# EAGLE board driver2 (EAGLE 6.5.0)
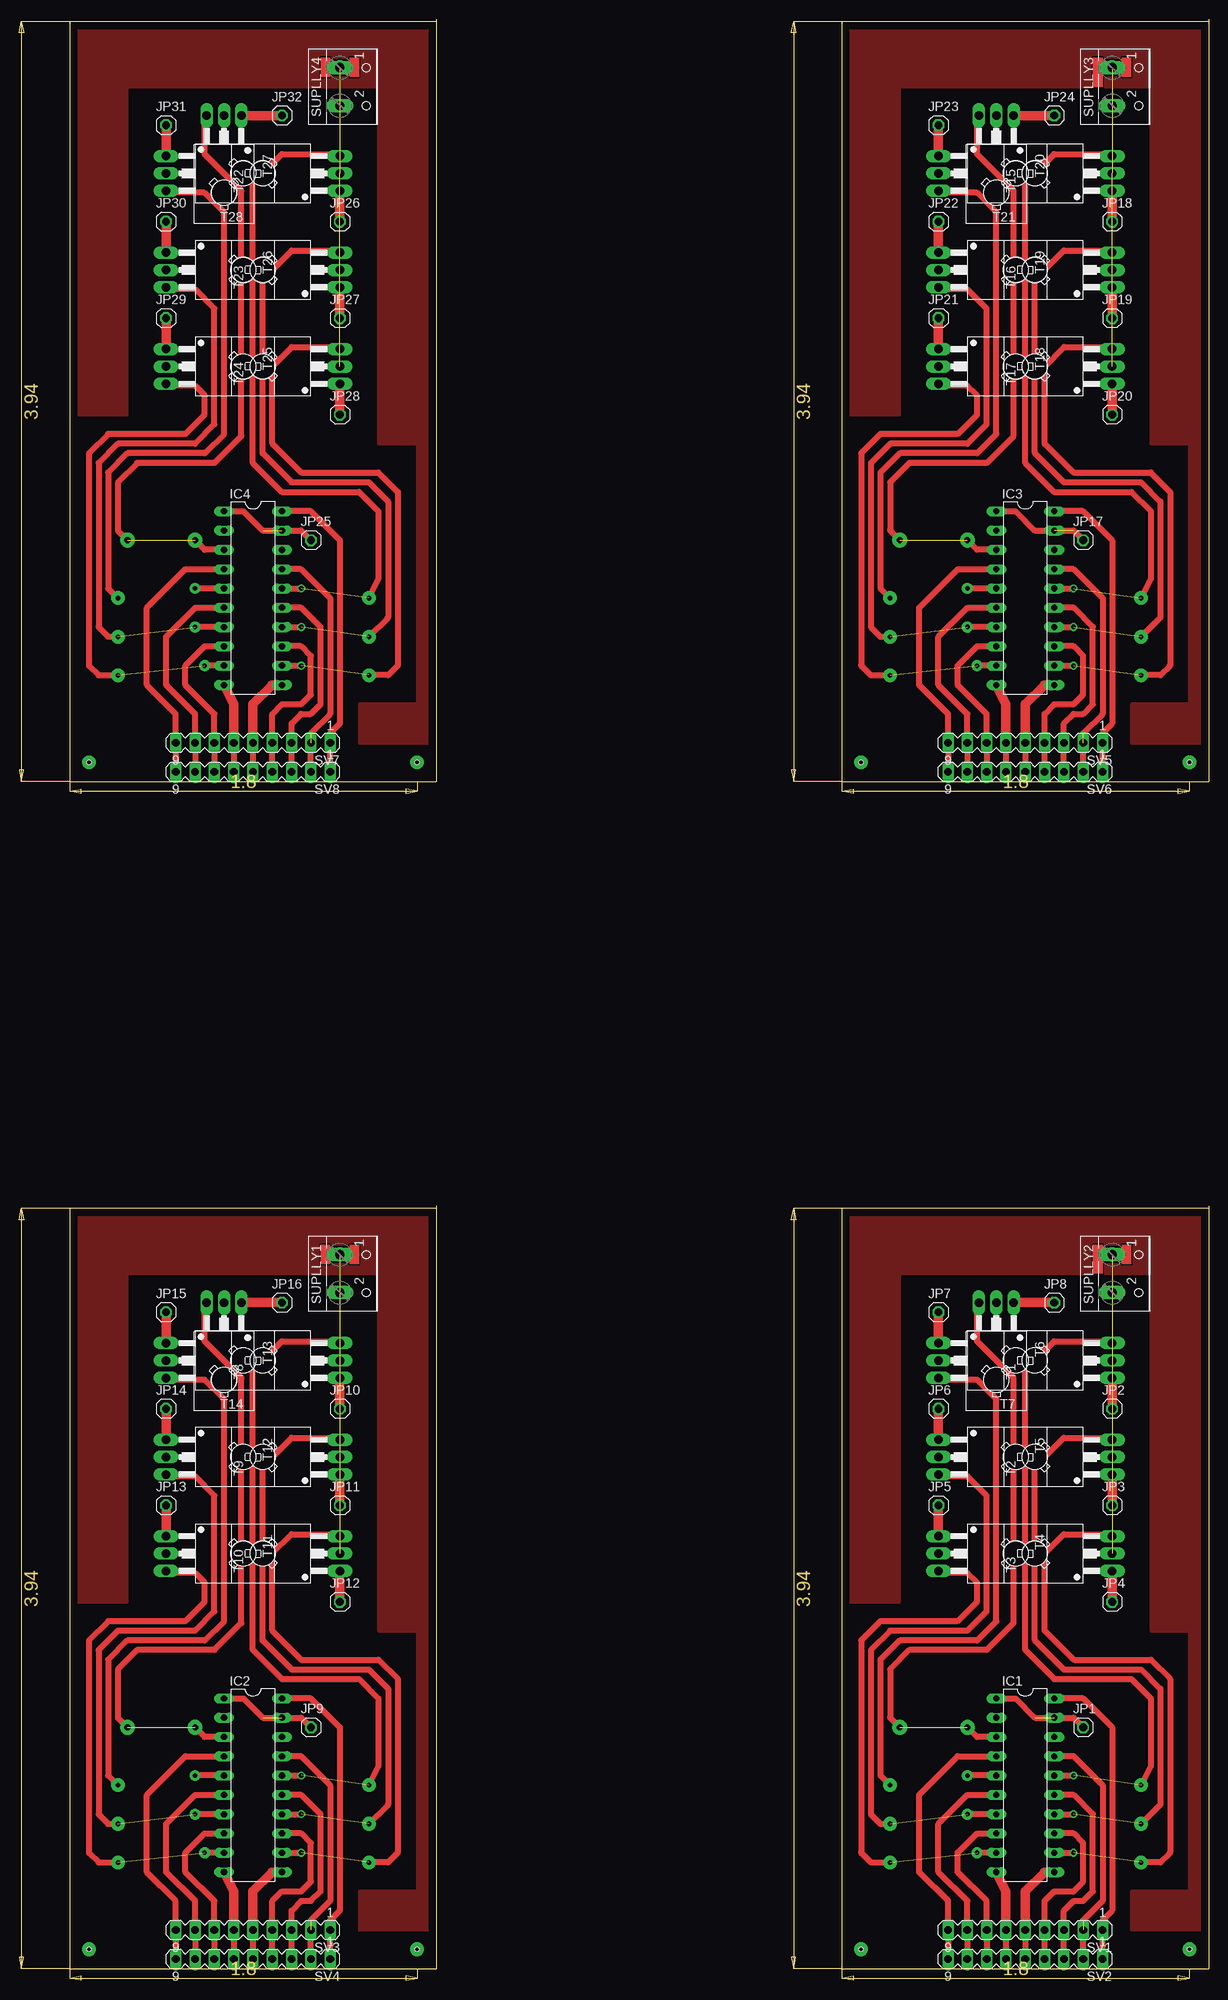
[diagram p0: board, top side]

Size 149.86 x 256.54 mm. Coordinates in mm from the lower left corner, seen from the top.
Outline: 149.84,0 101.6,0 101.6,100 149.84,100
Outline: 149.86,100.33 149.86,0
Outline: 48.24,0 0,0 0,100 48.24,100
Outline: 48.26,100.33 48.26,0
Outline: 149.84,156.21 101.6,156.21 101.6,256.21 149.84,256.21
Outline: 149.86,256.54 149.86,156.21
Outline: 48.24,156.21 0,156.21 0,256.21 48.24,256.21
Outline: 48.26,256.54 48.26,156.21
Copper layers (1*16): Top 0.035mm / dielectric 1.5mm / Bottom 0.035mm
Design rules "default": minimum track width 10mil, minimum drill 24mil, track to track 8mil, track to pad 8mil, pad to pad 8mil, via to via 8mil, smd to smd 8mil, copper to edge 40mil, drill to drill 8mil, minimum pad ring 10mil, minimum via ring 8mil, stop-mask expansion 4mil, vias tented up to drill 0mil, thermal gap 10mil
Holes 0.6 mm at 147.32,2.54 104.14,2.54 45.72,2.54 2.54,2.54 147.32,158.75 104.14,158.75 45.72,158.75 2.54,158.75

## Footprints (pad centres in the part's own frame; a part is rotated, then mirrored left to right if it is on the bottom)
DIL20 = drill 0.813 long: 1 -11.43,-3.81; 2 -8.89,-3.81; 3 -6.35,-3.81; 4 -3.81,-3.81; 5 -1.27,-3.81; 6 1.27,-3.81; 7 3.81,-3.81; 8 6.35,-3.81; 9 8.89,-3.81; 10 11.43,-3.81; 11 11.43,3.81; 12 8.89,3.81; 13 6.35,3.81; 14 3.81,3.81; 15 1.27,3.81; 16 -1.27,3.81; 17 -3.81,3.81; 18 -6.35,3.81; 19 -8.89,3.81; 20 -11.43,3.81
1X01 = drill 1.016 octagon: 1 0,0
W237-102 = drill 1.194 long: 1 -2.5,-1.27; 2 2.5,-1.27
MA09-1 = drill 1.016 long: 1 -10.16,0; 2 -7.62,0; 3 -5.08,0; 4 -2.54,0; 5 0,0; 6 2.54,0; 7 5.08,0; 8 7.62,0; 9 10.16,0
TO126 = drill 1.118 long: 1 -2.286,-5.08; 2 0,-5.08; 3 2.286,-5.08 | hole 3.302: 0,5.08

## Placement (x,y rotation side)
IC1  74LS244N  [DIL20]  125.73,24.13 270 top
IC2  74LS244N  [DIL20]  24.13,24.13 270 top
IC3  74LS244N  [DIL20]  125.73,180.34 270 top
IC4  74LS244N  [DIL20]  24.13,180.34 270 top
JP1  [1X01]  133.35,31.75 0 top
JP2  [1X01]  137.16,73.66 0 top
JP3  [1X01]  137.16,60.96 0 top
JP4  [1X01]  137.16,48.26 0 top
JP5  [1X01]  114.3,60.96 0 top
JP6  [1X01]  114.3,73.66 0 top
JP7  [1X01]  114.3,86.36 0 top
JP8  [1X01]  129.54,87.63 0 top
JP9  [1X01]  31.75,31.75 0 top
JP10  [1X01]  35.56,73.66 0 top
JP11  [1X01]  35.56,60.96 0 top
JP12  [1X01]  35.56,48.26 0 top
JP13  [1X01]  12.7,60.96 0 top
JP14  [1X01]  12.7,73.66 0 top
JP15  [1X01]  12.7,86.36 0 top
JP16  [1X01]  27.94,87.63 0 top
JP17  [1X01]  133.35,187.96 0 top
JP18  [1X01]  137.16,229.87 0 top
JP19  [1X01]  137.16,217.17 0 top
JP20  [1X01]  137.16,204.47 0 top
JP21  [1X01]  114.3,217.17 0 top
JP22  [1X01]  114.3,229.87 0 top
JP23  [1X01]  114.3,242.57 0 top
JP24  [1X01]  129.54,243.84 0 top
JP25  [1X01]  31.75,187.96 0 top
JP26  [1X01]  35.56,229.87 0 top
JP27  [1X01]  35.56,217.17 0 top
JP28  [1X01]  35.56,204.47 0 top
JP29  [1X01]  12.7,217.17 0 top
JP30  [1X01]  12.7,229.87 0 top
JP31  [1X01]  12.7,242.57 0 top
JP32  [1X01]  27.94,243.84 0 top
SUPLLY1  [W237-102]  36.83,91.44 270 top
SUPLLY2  [W237-102]  138.43,91.44 270 top
SUPLLY3  [W237-102]  138.43,247.65 270 top
SUPLLY4  [W237-102]  36.83,247.65 270 top
SV1  [MA09-1]  125.73,5.08 180 top
SV2  [MA09-1]  125.73,1.27 180 top
SV3  [MA09-1]  24.13,5.08 180 top
SV4  [MA09-1]  24.13,1.27 180 top
SV5  [MA09-1]  125.73,161.29 180 top
SV6  [MA09-1]  125.73,157.48 180 top
SV7  [MA09-1]  24.13,161.29 180 top
SV8  [MA09-1]  24.13,157.48 180 top
T1  BD139  [TO126]  132.08,80.01 90 top
T2  BD139  [TO126]  132.08,67.31 90 top
T3  BD139  [TO126]  132.08,54.61 90 top
T4  BD139  [TO126]  119.38,54.61 270 top
T5  BD139  [TO126]  119.38,67.31 270 top
T6  BD139  [TO126]  119.38,80.01 270 top
T7  BD139  [TO126]  121.92,82.55 180 top
T8  BD139  [TO126]  30.48,80.01 90 top
T9  BD139  [TO126]  30.48,67.31 90 top
T10  BD139  [TO126]  30.48,54.61 90 top
T11  BD139  [TO126]  17.78,54.61 270 top
T12  BD139  [TO126]  17.78,67.31 270 top
T13  BD139  [TO126]  17.78,80.01 270 top
T14  BD139  [TO126]  20.32,82.55 180 top
T15  BD139  [TO126]  132.08,236.22 90 top
T16  BD139  [TO126]  132.08,223.52 90 top
T17  BD139  [TO126]  132.08,210.82 90 top
T18  BD139  [TO126]  119.38,210.82 270 top
T19  BD139  [TO126]  119.38,223.52 270 top
T20  BD139  [TO126]  119.38,236.22 270 top
T21  BD139  [TO126]  121.92,238.76 180 top
T22  BD139  [TO126]  30.48,236.22 90 top
T23  BD139  [TO126]  30.48,223.52 90 top
T24  BD139  [TO126]  30.48,210.82 90 top
T25  BD139  [TO126]  17.78,210.82 270 top
T26  BD139  [TO126]  17.78,223.52 270 top
T27  BD139  [TO126]  17.78,236.22 270 top
T28  BD139  [TO126]  20.32,238.76 180 top

## Library data of the parts
IC1-IC4 = 74xx-us
JP1-JP32 = pinhead
SUPLLY1-SUPLLY4 = con-wago-500; MPN: 237-102; OC_FARNELL: unknown; OC_NEWARK: 70K9898
SV1-SV8 = con-lstb; OC_FARNELL: unknown; OC_NEWARK: unknown
T1-T28 = transistor

## Nets
ACTIVE: IC1.1 IC1.19 JP1.1
ACTIVE1: IC2.1 IC2.19 JP9.1
ACTIVE2: IC3.1 IC3.19 JP17.1
ACTIVE3: IC4.1 IC4.19 JP25.1
GND1: IC1.10 SV1.6 SV2.6
GND2: SUPLLY2.2
GND3: SUPLLY1.2
GND4: IC2.10 SV3.6 SV4.6
GND5: SUPLLY3.2
GND6: IC3.10 SV5.6 SV6.6
GND7: SUPLLY4.2
GND8: IC4.10 SV7.6 SV8.6
N$1: IC1.4 SV1.9 SV2.9
N$2: IC1.6 SV1.8 SV2.8
N$3: IC1.8 SV1.7 SV2.7
N$4: IC1.3 T7.3
N$5: IC1.11 SV1.5 SV2.5
N$6: IC1.13 SV1.4 SV2.4
N$7: IC1.16 T1.3
N$8: JP2.1 T1.1
N$9: IC1.14 T2.3
N$10: IC1.12 T3.3
N$11: IC1.15 SV1.3 SV2.3
N$12: IC1.9 T4.3
N$13: IC1.7 T5.3
N$14: JP3.1 T2.1
N$15: JP4.1 T3.1
N$16: JP5.1 T4.1
N$17: JP6.1 T5.1
N$18: JP7.1 T6.1
N$19: JP8.1 T7.1
N$20: T6.3
N$21: IC1.17 SV1.2 SV2.2
N$22: IC2.12 T10.3
N$23: JP10.1 T8.1
N$24: JP11.1 T9.1
N$25: JP12.1 T10.1
N$26: JP13.1 T11.1
N$27: JP14.1 T12.1
N$28: JP15.1 T13.1
N$29: JP16.1 T14.1
N$30: IC2.3 T14.3
N$31: IC2.16 T8.3
N$32: IC2.14 T9.3
N$33: IC2.9 T11.3
N$34: IC2.7 T12.3
N$35: T13.3
N$36: IC2.4 SV3.9 SV4.9
N$37: IC2.6 SV3.8 SV4.8
N$38: IC2.8 SV3.7 SV4.7
N$39: IC2.11 SV3.5 SV4.5
N$40: IC2.13 SV3.4 SV4.4
N$41: IC2.15 SV3.3 SV4.3
N$42: IC2.17 SV3.2 SV4.2
N$43: IC3.12 T17.3
N$44: JP18.1 T15.1
N$45: JP19.1 T16.1
N$46: JP20.1 T17.1
N$47: JP21.1 T18.1
N$48: JP22.1 T19.1
N$49: JP23.1 T20.1
N$50: JP24.1 T21.1
N$51: IC3.3 T21.3
N$52: IC3.16 T15.3
N$53: IC3.14 T16.3
N$54: IC3.9 T18.3
N$55: IC3.7 T19.3
N$56: T20.3
N$57: IC3.4 SV5.9 SV6.9
N$58: IC3.6 SV5.8 SV6.8
N$59: IC3.8 SV5.7 SV6.7
N$60: IC3.11 SV5.5 SV6.5
N$61: IC3.13 SV5.4 SV6.4
N$62: IC3.15 SV5.3 SV6.3
N$63: IC3.17 SV5.2 SV6.2
N$64: IC4.12 T24.3
N$65: JP26.1 T22.1
N$66: JP27.1 T23.1
N$67: JP28.1 T24.1
N$68: JP29.1 T25.1
N$69: JP30.1 T26.1
N$70: JP31.1 T27.1
N$71: JP32.1 T28.1
N$72: IC4.3 T28.3
N$73: IC4.16 T22.3
N$74: IC4.14 T23.3
N$75: IC4.9 T25.3
N$76: IC4.7 T26.3
N$77: T27.3
N$78: IC4.4 SV7.9 SV8.9
N$79: IC4.6 SV7.8 SV8.8
N$80: IC4.8 SV7.7 SV8.7
N$81: IC4.11 SV7.5 SV8.5
N$82: IC4.13 SV7.4 SV8.4
N$83: IC4.15 SV7.3 SV8.3
N$84: IC4.17 SV7.2 SV8.2
S$5: IC1.5
S$8: IC2.5
S$15: IC3.5
S$22: IC4.5
VCC1: IC1.20 SV1.1 SV2.1
VCC2: SUPLLY2.1 T1.2 T2.2 T3.2
VCC3: SUPLLY1.1 T8.2 T9.2 T10.2
VCC4: IC2.20 SV3.1 SV4.1
VCC5: SUPLLY3.1 T15.2 T16.2 T17.2
VCC6: IC3.20 SV5.1 SV6.1
VCC7: SUPLLY4.1 T22.2 T23.2 T24.2
VCC8: IC4.20 SV7.1 SV8.1

## Tracks (layer width: path | path; a pad name or v marks a point on that pad's centre or on a via)
ACTIVE  (1 unrouted)
  Top 0.813: IC1.1 124.46,35.56 127,33.02 132.08,33.02 JP1.1
ACTIVE1  (1 unrouted)
  Top 0.813: IC2.1 22.86,35.56 25.4,33.02 30.48,33.02 JP9.1
ACTIVE2  (1 unrouted)
  Top 0.813: IC3.1 124.46,191.77 127,189.23 132.08,189.23 JP17.1
ACTIVE3  (1 unrouted)
  Top 0.813: IC4.1 22.86,191.77 25.4,189.23 30.48,189.23 JP25.1
GND1
  Top 0.813: SV1.6 SV2.6
  Top 1.27: SV1.6 123.19,10.16 IC1.10
GND4
  Top 0.813: SV3.6 SV4.6
  Top 1.27: SV3.6 21.59,10.16 IC2.10
GND6
  Top 0.813: SV5.6 SV6.6
  Top 1.27: SV5.6 123.19,166.37 IC3.10
GND8
  Top 0.813: SV7.6 SV8.6
  Top 1.27: SV7.6 21.59,166.37 IC4.10
N$1
  Top 0.813: SV2.9 SV1.9 115.57,8.89 111.76,12.7 111.76,22.86 116.84,27.94 IC1.4
N$2
  Top 0.813: SV2.8 SV1.8 118.11,8.89 114.3,12.7 114.3,19.05 118.11,22.86 IC1.6
N$3
  Top 0.813: SV2.7 SV1.7 120.65,8.89 116.84,12.7 116.84,15.24 119.38,17.78 IC1.8
N$4  (1 unrouted)
  Top 0.813: T7.3 119.38,87.38 119.38,82.55 124.21,77.72 124.21,45.47 120.65,41.91 110.49,41.91 107.95,39.37 107.95,33.12 arc45 108.02,32.95 109.22,31.75 | IC1.3 119.38,30.48 118.11,31.75
N$5
  Top 0.813: SV1.5 SV2.5
  Top 1.27: SV1.5 125.73,10.16 128.2,12.63 arc-45 128.38,12.7 IC1.11
N$6
  Top 0.813: SV2.4 SV1.4 128.27,8.89 129.54,10.16 132.08,10.16 133.35,11.43 133.35,16.51 132.08,17.78 IC1.13
N$7  (via drill 0.6 pad 0.41, 0.6 pad 1.78)  (1 unrouted)
  Top 0.813: v140.97,24.13 142.24,26.67 142.24,35.56 139.7,38.1 129.54,38.1 125.73,41.91 125.73,78.74 129.54,82.55 136.91,82.55 T1.3 | IC1.16 v132.08,25.4
N$8
  Top 1.27: JP2.1 T1.1
N$9  (via drill 0.6 pad 0.41, 0.6 pad 1.78)  (1 unrouted)
  Top 0.813: IC1.14 v132.08,20.32 | T2.3 136.91,69.85 130.81,69.85 127,66.04 127,43.18 130.81,39.37 140.97,39.37 143.51,36.83 143.51,21.7 arc-45 143.44,21.52 v140.97,19.05
N$10  (via drill 0.6 pad 1.78)  (1 unrouted)
  Top 0.813: T3.3 136.91,57.15 130.81,57.15 128.27,54.61 128.27,44.45 132.08,40.64 142.24,40.64 144.78,38.1 144.78,15.34 arc-45 144.71,15.17 143.51,13.97 v140.97,13.97 | IC1.12 132.08,15.24
N$11
  Top 0.813: SV2.3 SV1.3 130.81,7.62 132.08,8.89 133.35,8.89 134.62,10.16 134.62,20.32 132.08,22.86 IC1.15
N$12  (via drill 0.6 pad 1.42, 0.6 pad 1.78)  (1 unrouted)
  Top 0.813: IC1.9 v119.38,15.24 | T4.3 114.55,52.07 118.11,52.07 119.38,50.8 119.38,48.26 116.84,45.72 106.68,45.72 104.14,43.18 104.14,15.34 arc45 104.21,15.17 105.41,13.97 v107.95,13.97
N$13  (via drill 0.6 pad 1.42, 0.6 pad 1.78)  (1 unrouted)
  Top 0.813: IC1.7 v118.11,20.32 | T5.3 114.3,64.77 118.11,64.77 120.65,62.23 120.65,46.99 118.11,44.45 107.95,44.45 105.41,41.91 105.41,20.32 106.68,19.05 v107.95,19.05
N$14
  Top 1.27: JP3.1 T2.1
N$15
  Top 1.27: JP4.1 T3.1
N$16
  Top 1.27: JP5.1 T4.1
N$17
  Top 1.27: JP6.1 T5.1
N$18
  Top 1.27: T6.1 JP7.1
N$19
  Top 1.27: JP8.1 T7.1
N$20  (via drill 0.6 pad 1.78)
  Top 0.813: v107.95,24.13 106.68,25.4 106.68,40.64 109.22,43.18 119.38,43.18 121.92,45.72 121.92,74.93 119.38,77.47 114.55,77.47 T6.3
N$21  (1 unrouted)
  Top 0.813: SV2.2 SV1.2 | 133.35,6.35 135.89,8.89 135.89,24.13 132.08,27.94 IC1.17
N$22  (via drill 0.6 pad 1.78)  (1 unrouted)
  Top 0.813: T10.3 35.31,57.15 29.21,57.15 26.67,54.61 26.67,44.45 30.48,40.64 40.64,40.64 43.18,38.1 43.18,15.34 arc-45 43.11,15.17 41.91,13.97 v39.37,13.97 | IC2.12 30.48,15.24
N$23
  Top 1.27: JP10.1 T8.1
N$24
  Top 1.27: JP11.1 T9.1
N$25
  Top 1.27: JP12.1 T10.1
N$26
  Top 1.27: JP13.1 T11.1
N$27
  Top 1.27: JP14.1 T12.1
N$28
  Top 1.27: T13.1 JP15.1
N$29
  Top 1.27: JP16.1 T14.1
N$30  (1 unrouted)
  Top 0.813: T14.3 17.78,87.38 17.78,82.55 22.61,77.72 22.61,45.47 19.05,41.91 8.89,41.91 6.35,39.37 6.35,33.12 arc45 6.42,32.95 7.62,31.75 | IC2.3 17.78,30.48 16.51,31.75
N$31  (via drill 0.6 pad 0.41, 0.6 pad 1.78)  (1 unrouted)
  Top 0.813: v39.37,24.13 40.64,26.67 40.64,35.56 38.1,38.1 27.94,38.1 24.13,41.91 24.13,78.74 27.94,82.55 35.31,82.55 T8.3 | IC2.16 v30.48,25.4
N$32  (via drill 0.6 pad 0.41, 0.6 pad 1.78)  (1 unrouted)
  Top 0.813: IC2.14 v30.48,20.32 | T9.3 35.31,69.85 29.21,69.85 25.4,66.04 25.4,43.18 29.21,39.37 39.37,39.37 41.91,36.83 41.91,21.7 arc-45 41.84,21.52 v39.37,19.05
N$33  (via drill 0.6 pad 1.42, 0.6 pad 1.78)  (1 unrouted)
  Top 0.813: IC2.9 v17.78,15.24 | T11.3 12.95,52.07 16.51,52.07 17.78,50.8 17.78,48.26 15.24,45.72 5.08,45.72 2.54,43.18 2.54,15.34 arc45 2.61,15.17 3.81,13.97 v6.35,13.97
N$34  (via drill 0.6 pad 1.42, 0.6 pad 1.78)  (1 unrouted)
  Top 0.813: IC2.7 v16.51,20.32 | T12.3 12.7,64.77 16.51,64.77 19.05,62.23 19.05,46.99 16.51,44.45 6.35,44.45 3.81,41.91 3.81,20.32 5.08,19.05 v6.35,19.05
N$35  (via drill 0.6 pad 1.78)
  Top 0.813: v6.35,24.13 5.08,25.4 5.08,40.64 7.62,43.18 17.78,43.18 20.32,45.72 20.32,74.93 17.78,77.47 12.95,77.47 T13.3
N$36
  Top 0.813: SV4.9 SV3.9 13.97,8.89 10.16,12.7 10.16,22.86 15.24,27.94 IC2.4
N$37
  Top 0.813: SV4.8 SV3.8 16.51,8.89 12.7,12.7 12.7,19.05 16.51,22.86 IC2.6
N$38
  Top 0.813: SV4.7 SV3.7 19.05,8.89 15.24,12.7 15.24,15.24 17.78,17.78 IC2.8
N$39
  Top 0.813: SV3.5 SV4.5
  Top 1.27: SV3.5 24.13,10.16 26.6,12.63 arc-45 26.78,12.7 IC2.11
N$40
  Top 0.813: SV4.4 SV3.4 26.67,8.89 27.94,10.16 30.48,10.16 31.75,11.43 31.75,16.51 30.48,17.78 IC2.13
N$41
  Top 0.813: SV4.3 SV3.3 29.21,7.62 30.48,8.89 31.75,8.89 33.02,10.16 33.02,20.32 30.48,22.86 IC2.15
N$42  (1 unrouted)
  Top 0.813: SV4.2 SV3.2 | 31.75,6.35 34.29,8.89 34.29,24.13 30.48,27.94 IC2.17
N$43  (via drill 0.6 pad 1.78)  (1 unrouted)
  Top 0.813: T17.3 136.91,213.36 130.81,213.36 128.27,210.82 128.27,200.66 132.08,196.85 142.24,196.85 144.78,194.31 144.78,171.56 arc-45 144.71,171.38 143.51,170.18 v140.97,170.18 | IC3.12 132.08,171.45
N$44
  Top 1.27: JP18.1 T15.1
N$45
  Top 1.27: JP19.1 T16.1
N$46
  Top 1.27: JP20.1 T17.1
N$47
  Top 1.27: JP21.1 T18.1
N$48
  Top 1.27: JP22.1 T19.1
N$49
  Top 1.27: T20.1 JP23.1
N$50
  Top 1.27: JP24.1 T21.1
N$51  (1 unrouted)
  Top 0.813: T21.3 119.38,243.59 119.38,238.76 124.21,233.93 124.21,201.68 120.65,198.12 110.49,198.12 107.95,195.58 107.95,189.34 arc45 108.02,189.16 109.22,187.96 | IC3.3 119.38,186.69 118.11,187.96
N$52  (via drill 0.6 pad 0.41, 0.6 pad 1.78)  (1 unrouted)
  Top 0.813: v140.97,180.34 142.24,182.88 142.24,191.77 139.7,194.31 129.54,194.31 125.73,198.12 125.73,234.95 129.54,238.76 136.91,238.76 T15.3 | IC3.16 v132.08,181.61
N$53  (via drill 0.6 pad 0.41, 0.6 pad 1.78)  (1 unrouted)
  Top 0.813: IC3.14 v132.08,176.53 | T16.3 136.91,226.06 130.81,226.06 127,222.25 127,199.39 130.81,195.58 140.97,195.58 143.51,193.04 143.51,177.91 arc-45 143.44,177.73 v140.97,175.26
N$54  (via drill 0.6 pad 1.42, 0.6 pad 1.78)  (1 unrouted)
  Top 0.813: IC3.9 v119.38,171.45 | T18.3 114.55,208.28 118.11,208.28 119.38,207.01 119.38,204.47 116.84,201.93 106.68,201.93 104.14,199.39 104.14,171.56 arc45 104.21,171.38 105.41,170.18 v107.95,170.18
N$55  (via drill 0.6 pad 1.42, 0.6 pad 1.78)  (1 unrouted)
  Top 0.813: IC3.7 v118.11,176.53 | T19.3 114.3,220.98 118.11,220.98 120.65,218.44 120.65,203.2 118.11,200.66 107.95,200.66 105.41,198.12 105.41,176.53 106.68,175.26 v107.95,175.26
N$56  (via drill 0.6 pad 1.78)
  Top 0.813: v107.95,180.34 106.68,181.61 106.68,196.85 109.22,199.39 119.38,199.39 121.92,201.93 121.92,231.14 119.38,233.68 114.55,233.68 T20.3
N$57
  Top 0.813: SV6.9 SV5.9 115.57,165.1 111.76,168.91 111.76,179.07 116.84,184.15 IC3.4
N$58
  Top 0.813: SV6.8 SV5.8 118.11,165.1 114.3,168.91 114.3,175.26 118.11,179.07 IC3.6
N$59
  Top 0.813: SV6.7 SV5.7 120.65,165.1 116.84,168.91 116.84,171.45 119.38,173.99 IC3.8
N$60
  Top 0.813: SV5.5 SV6.5
  Top 1.27: SV5.5 125.73,166.37 128.2,168.84 arc-45 128.38,168.91 IC3.11
N$61
  Top 0.813: SV6.4 SV5.4 128.27,165.1 129.54,166.37 132.08,166.37 133.35,167.64 133.35,172.72 132.08,173.99 IC3.13
N$62
  Top 0.813: SV6.3 SV5.3 130.81,163.83 132.08,165.1 133.35,165.1 134.62,166.37 134.62,176.53 132.08,179.07 IC3.15
N$63  (1 unrouted)
  Top 0.813: SV6.2 SV5.2 | 133.35,162.56 135.89,165.1 135.89,180.34 132.08,184.15 IC3.17
N$64  (via drill 0.6 pad 1.78)  (1 unrouted)
  Top 0.813: T24.3 35.31,213.36 29.21,213.36 26.67,210.82 26.67,200.66 30.48,196.85 40.64,196.85 43.18,194.31 43.18,171.56 arc-45 43.11,171.38 41.91,170.18 v39.37,170.18 | IC4.12 30.48,171.45
N$65
  Top 1.27: JP26.1 T22.1
N$66
  Top 1.27: JP27.1 T23.1
N$67
  Top 1.27: JP28.1 T24.1
N$68
  Top 1.27: JP29.1 T25.1
N$69
  Top 1.27: JP30.1 T26.1
N$70
  Top 1.27: T27.1 JP31.1
N$71
  Top 1.27: JP32.1 T28.1
N$72  (1 unrouted)
  Top 0.813: T28.3 17.78,243.59 17.78,238.76 22.61,233.93 22.61,201.68 19.05,198.12 8.89,198.12 6.35,195.58 6.35,189.34 arc45 6.42,189.16 7.62,187.96 | IC4.3 17.78,186.69 16.51,187.96
N$73  (via drill 0.6 pad 0.41, 0.6 pad 1.78)  (1 unrouted)
  Top 0.813: v39.37,180.34 40.64,182.88 40.64,191.77 38.1,194.31 27.94,194.31 24.13,198.12 24.13,234.95 27.94,238.76 35.31,238.76 T22.3 | IC4.16 v30.48,181.61
N$74  (via drill 0.6 pad 0.41, 0.6 pad 1.78)  (1 unrouted)
  Top 0.813: IC4.14 v30.48,176.53 | T23.3 35.31,226.06 29.21,226.06 25.4,222.25 25.4,199.39 29.21,195.58 39.37,195.58 41.91,193.04 41.91,177.91 arc-45 41.84,177.73 v39.37,175.26
N$75  (via drill 0.6 pad 1.42, 0.6 pad 1.78)  (1 unrouted)
  Top 0.813: IC4.9 v17.78,171.45 | T25.3 12.95,208.28 16.51,208.28 17.78,207.01 17.78,204.47 15.24,201.93 5.08,201.93 2.54,199.39 2.54,171.56 arc45 2.61,171.38 3.81,170.18 v6.35,170.18
N$76  (via drill 0.6 pad 1.42, 0.6 pad 1.78)  (1 unrouted)
  Top 0.813: IC4.7 v16.51,176.53 | T26.3 12.7,220.98 16.51,220.98 19.05,218.44 19.05,203.2 16.51,200.66 6.35,200.66 3.81,198.12 3.81,176.53 5.08,175.26 v6.35,175.26
N$77  (via drill 0.6 pad 1.78)
  Top 0.813: v6.35,180.34 5.08,181.61 5.08,196.85 7.62,199.39 17.78,199.39 20.32,201.93 20.32,231.14 17.78,233.68 12.95,233.68 T27.3
N$78
  Top 0.813: SV8.9 SV7.9 13.97,165.1 10.16,168.91 10.16,179.07 15.24,184.15 IC4.4
N$79
  Top 0.813: SV8.8 SV7.8 16.51,165.1 12.7,168.91 12.7,175.26 16.51,179.07 IC4.6
N$80
  Top 0.813: SV8.7 SV7.7 19.05,165.1 15.24,168.91 15.24,171.45 17.78,173.99 IC4.8
N$81
  Top 0.813: SV7.5 SV8.5
  Top 1.27: SV7.5 24.13,166.37 26.6,168.84 arc-45 26.78,168.91 IC4.11
N$82
  Top 0.813: SV8.4 SV7.4 26.67,165.1 27.94,166.37 30.48,166.37 31.75,167.64 31.75,172.72 30.48,173.99 IC4.13
N$83
  Top 0.813: SV8.3 SV7.3 29.21,163.83 30.48,165.1 31.75,165.1 33.02,166.37 33.02,176.53 30.48,179.07 IC4.15
N$84  (1 unrouted)
  Top 0.813: SV8.2 SV7.2 | 31.75,162.56 34.29,165.1 34.29,180.34 30.48,184.15 IC4.17
S$1  (via drill 1.2 pad 1.78)
  other vias: 137.16,93.98
S$2  (via drill 0.6 pad 1.78)
  other vias: 104.14,2.54
S$3  (via drill 0.6 pad 1.78)
  other vias: 147.32,2.54
S$4  (via drill 0.6 pad 0.41)
  other vias: 132.08,15.24
S$5  (via drill 0.6 pad 1.42)
  Top 0.813: IC1.5 v118.11,25.4
S$6  (via drill 0.8 pad 1.93)
  other vias: 109.22,31.75
S$7  (via drill 0.8 pad 1.93)
  other vias: 118.11,31.75
S$8  (via drill 0.6 pad 1.42)
  Top 0.813: IC2.5 v16.51,25.4
S$9  (via drill 1.2 pad 1.78)
  other vias: 35.56,93.98
S$10  (via drill 0.6 pad 1.78)
  other vias: 2.54,2.54
S$11  (via drill 0.6 pad 1.78)
  other vias: 45.72,2.54
S$12  (via drill 0.6 pad 0.41)
  other vias: 30.48,15.24
S$13  (via drill 0.8 pad 1.93)
  other vias: 7.62,31.75
S$14  (via drill 0.8 pad 1.93)
  other vias: 16.51,31.75
S$15  (via drill 0.6 pad 1.42)
  Top 0.813: IC3.5 v118.11,181.61
S$16  (via drill 1.2 pad 1.78)
  other vias: 137.16,250.19
S$17  (via drill 0.6 pad 1.78)
  other vias: 104.14,158.75
S$18  (via drill 0.6 pad 1.78)
  other vias: 147.32,158.75
S$19  (via drill 0.6 pad 0.41)
  other vias: 132.08,171.45
S$20  (via drill 0.8 pad 1.93)
  other vias: 109.22,187.96
S$21  (via drill 0.8 pad 1.93)
  other vias: 118.11,187.96
S$22  (via drill 0.6 pad 1.42)
  Top 0.813: IC4.5 v16.51,181.61
S$23  (via drill 1.2 pad 1.78)
  other vias: 35.56,250.19
S$24  (via drill 0.6 pad 1.78)
  other vias: 2.54,158.75
S$25  (via drill 0.6 pad 1.78)
  other vias: 45.72,158.75
S$26  (via drill 0.6 pad 0.41)
  other vias: 30.48,171.45
S$27  (via drill 0.8 pad 1.93)
  other vias: 7.62,187.96
S$28  (via drill 0.8 pad 1.93)
  other vias: 16.51,187.96
VCC1
  Top 0.813: SV2.1 SV1.1 135.89,6.35 137.16,7.62 137.16,31.75 133.35,35.56 IC1.20
VCC2  (3 unrouted)
  pour Top: 101.6,100.33 101.6,48.26 109.22,48.26 109.22,49.53 109.22,91.44 142.24,91.44 142.24,44.45 147.32,44.45 147.32,10.16 139.7,10.16 139.7,8.89 139.7,5.08 149.86,5.08 149.86,100.33
VCC3  (3 unrouted)
  pour Top: 0,100.33 0,48.26 7.62,48.26 7.62,49.53 7.62,91.44 40.64,91.44 40.64,44.45 45.72,44.45 45.72,10.16 38.1,10.16 38.1,8.89 38.1,5.08 48.26,5.08 48.26,100.33
VCC4
  Top 0.813: SV4.1 SV3.1 34.29,6.35 35.56,7.62 35.56,31.75 31.75,35.56 IC2.20
VCC5  (3 unrouted)
  pour Top: 101.6,256.54 101.6,204.47 109.22,204.47 109.22,205.74 109.22,247.65 142.24,247.65 142.24,200.66 147.32,200.66 147.32,166.37 139.7,166.37 139.7,165.1 139.7,161.29 149.86,161.29 149.86,256.54
VCC6
  Top 0.813: SV6.1 SV5.1 135.89,162.56 137.16,163.83 137.16,187.96 133.35,191.77 IC3.20
VCC7  (3 unrouted)
  pour Top: 0,256.54 0,204.47 7.62,204.47 7.62,205.74 7.62,247.65 40.64,247.65 40.64,200.66 45.72,200.66 45.72,166.37 38.1,166.37 38.1,165.1 38.1,161.29 48.26,161.29 48.26,256.54
VCC8
  Top 0.813: SV8.1 SV7.1 34.29,162.56 35.56,163.83 35.56,187.96 31.75,191.77 IC4.20
(copper drawn outside any net)
  shapes: Top area x8